# Altium PCB JLink-OB-Wiki.PcbDoc
Units mil, origin at the board's own origin, x right, y up, seen from the top; angles counter-clockwise.
Board outline 1290 x 1300 mil, 2 copper layers (Top Layer, Bottom Layer); 43 components, 33 nets, 168 pads, 83 vias.
Unrouted connection lines stored in the file: 1.
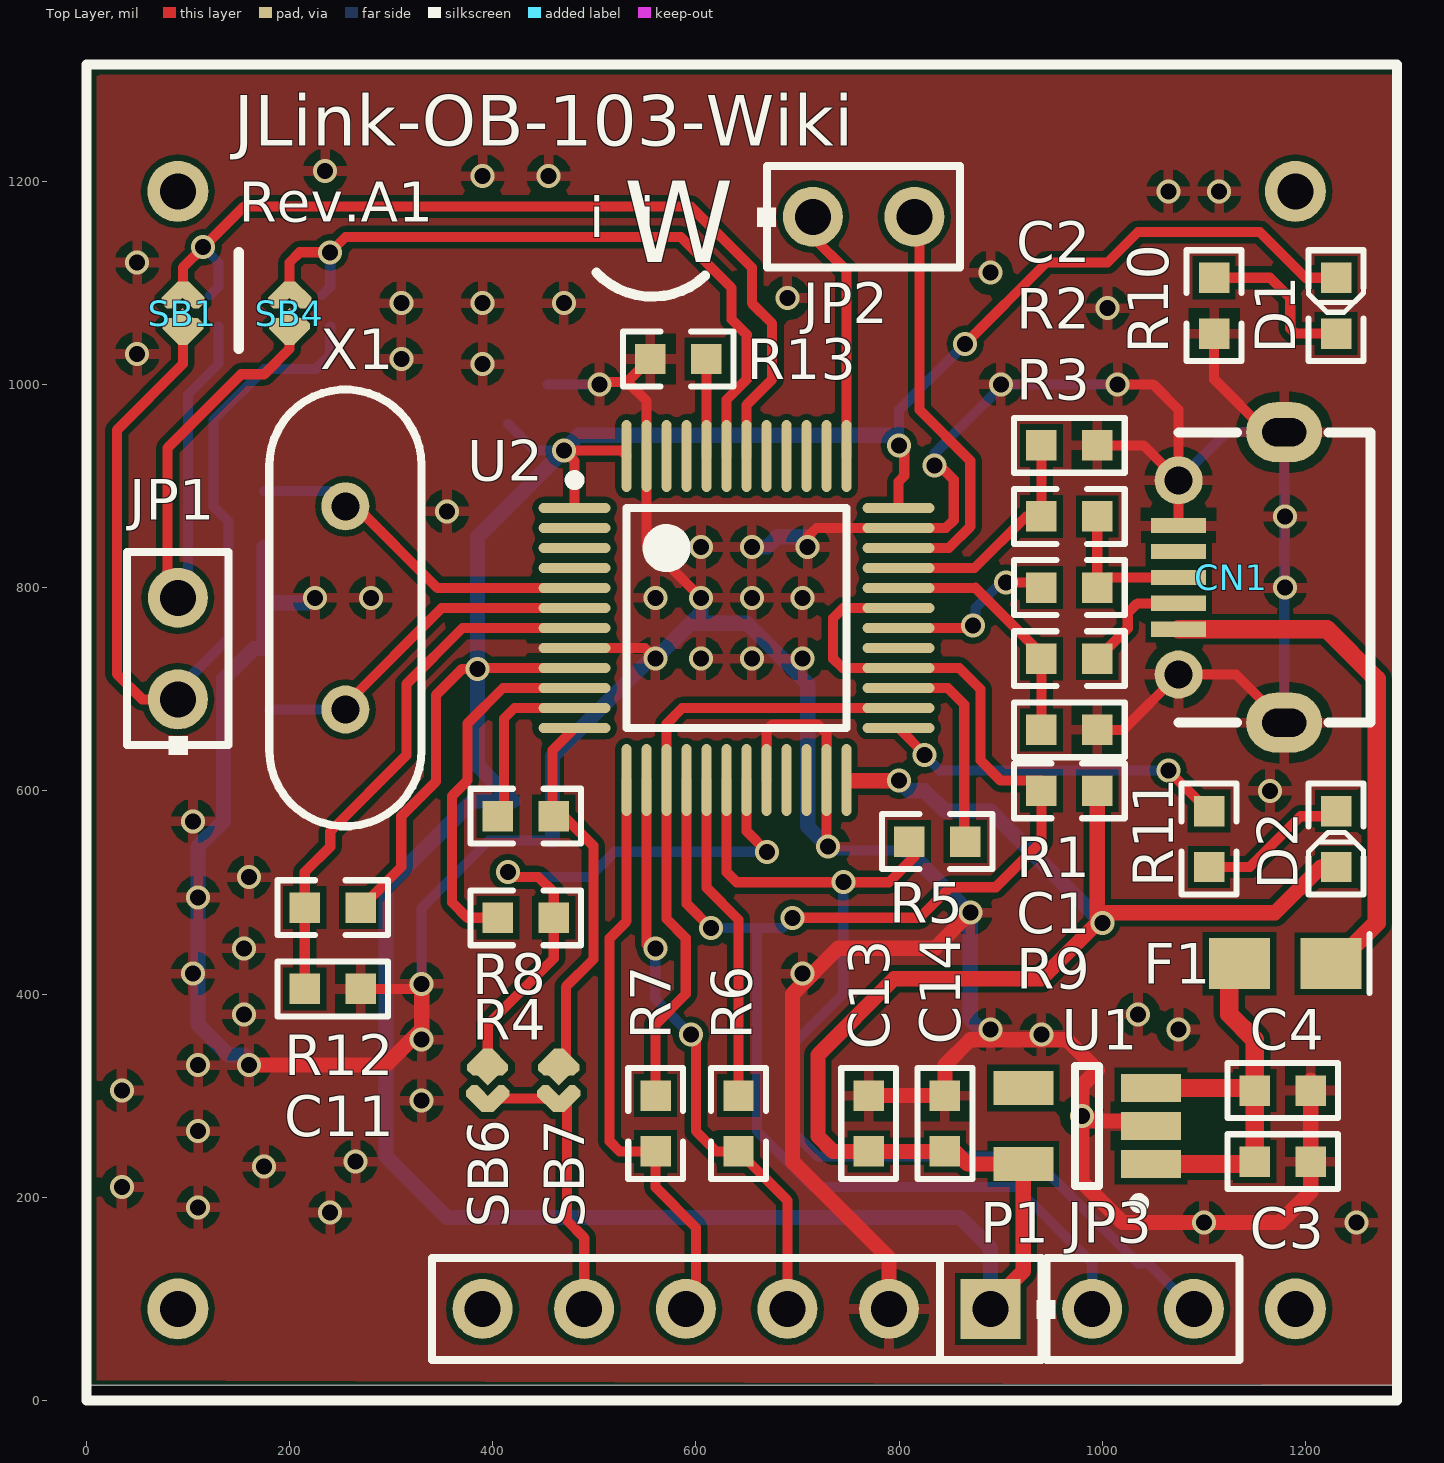
[diagram p0: Top Layer view]
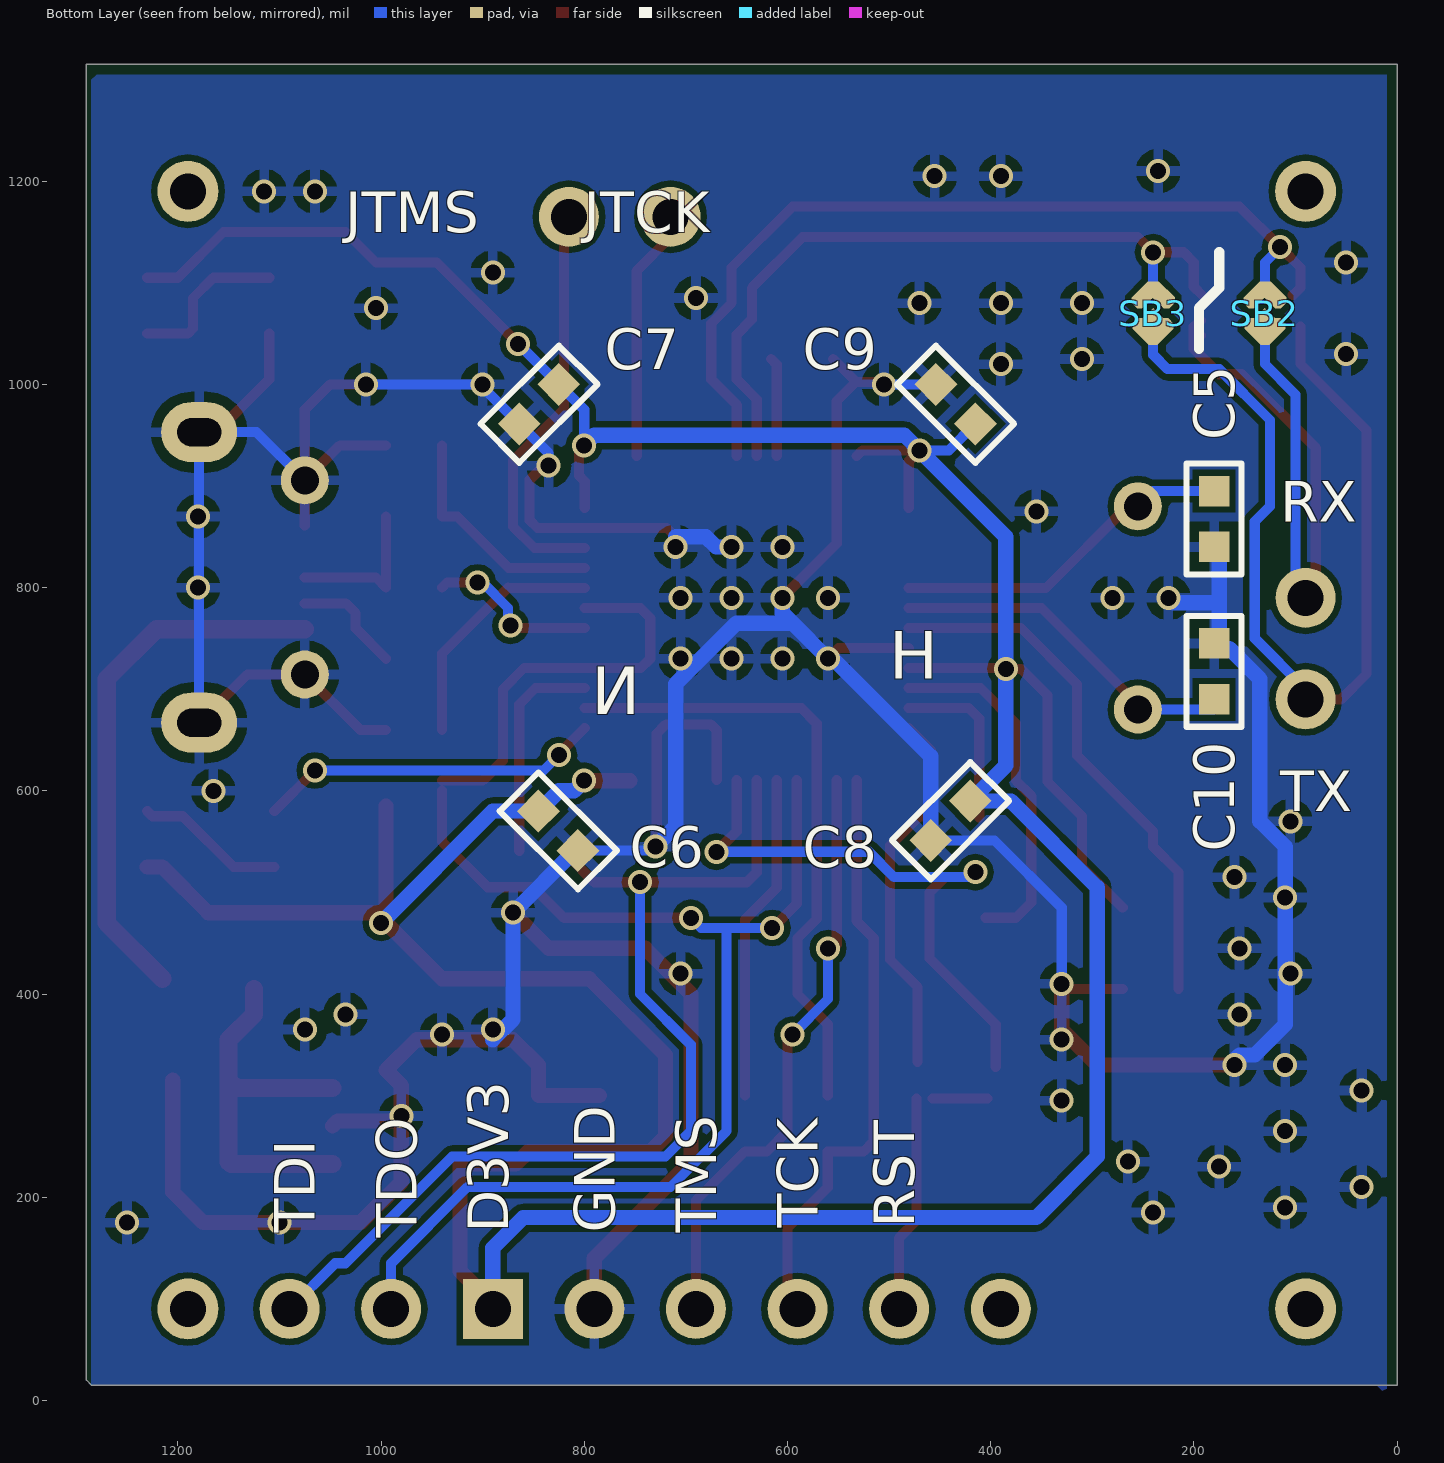
[diagram p1: Bottom Layer view, seen from below]

## Layer stack, top to bottom
Top Solder: solder mask 0.4, Solder Resist, Dk 3.5
Top Layer: signal copper 1.4
Dielectric1: dielectric 12.6, FR-4, Dk 4.8
Bottom Layer: signal copper 1.4
Bottom Solder: solder mask 0.4, Solder Resist, Dk 3.5

## Board outline
0,1315 0,15 1285,15 1290,20 1290,1315

## Design rules (kind name [scope] priority, off if disabled: settings)
Clearance [All] p1: gap=6
PolygonConnect [All] p1: connectstyle=Relief reliefconductorwidth=10 reliefentries=4 polygonreliefangle="90 Angle" airgapwidth=10
RoomDefinition JLink-OB-Wiki [InComponentClass('JLink-OB-Wiki')] p1: confinementstyle=ConfineIn formatcopy=TRUE lockcomponents=FALSE outline 10,10 1290,10 1290,1315 10,1315
RoutingCorners [All] p1: cornerstyle=Round minsetback=100 maxsetback=100
RoutingVias [All] p1: holewidth=15.75 width=23.62 viastyle="Through Hole" minholewidth=15.75 minwidth=23.62 maxholewidth=15.75 maxwidth=23.62
SolderMaskExpansion [All] p1: expansion=4
Width [All] p1: maxlimit=50 minlimit=8 preferedwidth=10
29 further rules are at their usual default settings.

## Components (designator, comment, footprint, x,y, rotation, side; value= is the part's Value field where it differs from the comment)
C1 "Cap_0603" 0603C 995,660 r180 top
C2 "Cap_0603" 0603C 995,940 r180 top
C3 "1uF" 0603C 1205,235 r180 top
C4 "100nF" 0603C 1205,305 r180 top
C5 "Cap_0603" 0603C 180,895 r270 bottom
C6 "Cap_0603" 0603C 845,580 r225 bottom
C7 "Cap_0603" 0603C 825,1000 r315 bottom
C8 "Cap_0603" 0603C 420,590 r315 bottom
C9 "Cap_0603" 0603C 415,961.11 r45 bottom
C10 "Cap_0603" 0603C 180,690 r90 bottom
C11 "Cap_0603" 0603C 215,405 r0 top
C13 "100nF" 0603C 770,300 r270 top
C14 "1uF" 0603C 845,245 r90 top
CN1 "USB-Micro" USB_MICRO_5S_B 1075,810 r270 top locked
D1 "LED_0603" LED-0603 1230,1105 r270 top
D2 "LED_0603" LED-0603 1230,525 r90 top
F1 "500mA" 0805M 1225,430 r180 top
JP1 "JP2" HDR1X2/2.54mm 90,690 r90 top
JP2 "JP2" HDR1X2/2.54mm 715,1165 r0 top
JP3 "JP2" HDR1X2/2.54mm 990,90 r0 top
P1 "Synio Power Header 6 Pin" HDR1X6/2.54MM 890,90 r180 top (schematic designator SW)
R1 "Res_0603" 0603R 995,730 r180 top
R2 "Res_0603" 0603R 995,870 r180 top
R3 "Res_0603" 0603R 995,800 r180 top
R4 "Res_0603" 0603R 460,475 r180 top
R5 "Res_0603" 0603R 810,550 r0 top
R6 "Res_0603" 0603R 641.87,245 r90 top
R7 "Res_0603" 0603R 560.31,245 r90 top
R8 "Res_0603" 0603R 460,575 r180 top
R9 "Res_0603" 0603R 940,600 r0 top
R10 "Res_0603" 0603R 1110,1050 r90 top
R11 "Res_0603" 0603R 1105,580 r270 top
R12 "Res_0603" 0603R 215,485 r0 top
R13 "Res_0603" 0603R 555,1025 r0 top
SB1 "Circuit Breaker" JP2_SMD 95,1070 r270 top
SB2 "Circuit Breaker" JP2_SMD 130,1070 r270 bottom
SB3 "Circuit Breaker" JP2_SMD 240,1070 r270 bottom
SB4 "Circuit Breaker" JP2_SMD 200,1070 r270 top
SB6 "Circuit Breaker" JP2_SMD 395,315 r90 top
SB7 "Circuit Breaker" JP2_SMD 465,315 r90 top
U1 "LDO" SOT23-5 985,270 r180 top
U2 "STM32F103C" LQFP48_N 640,770 r0 top (schematic designator STM32)
X1 "XTAL_5032_2P" XTAL 255,780 r90 top (schematic designator XT)

## Footprints (in the part's own frame and the unit in brackets; to place one, negate y for a bottom-side part, rotate by r counter-clockwise, add the part's x,y. Pads: shape width x height; smd on the part's side, far side on the other; paste and mask are expansions set on the pad)
0603C [mil]
  rect 30x30 smd: 1(0,0) 2(55,0)
  silkscreen extent -27,-27 82,27, body extent -4,-16 59,16, height 12
0603R [mil]
  rect 30x30 smd: 1(0,0) 2(55,0)
  silkscreen extent -27,-27 82,27, body extent -4,-18 58,16, height 18
0805M [mil]
  rect 60x50 smd: 1(0,0) 2(90,0)
  silkscreen extent -38,-29 -38,29
HDR1X2/2.54mm [mm]
  round 1.5 hole 0.9: 1(0,0) 2(2.54,0)
  silkscreen extent -1.4,-1.27 3.68,1.27, body extent -1.29,-1.5 3.79,1.42, height 8.51
HDR1X6/2.54MM [mm] "Connector; Header; 6 Position"
  rect 1.5x1.5 hole 0.9: 1(0,0)
  round 1.5 hole 0.9: 2(2.54,0) 3(5.08,0) 4(7.62,0) 5(10.16,0) 6(12.7,0)
  silkscreen extent -1.52,-1.27 13.97,1.27, body extent -1.32,-1.5 13.92,1.42, height 8.51
JP2_SMD [mil]
  oct 15x30 smd rot 45: 1(-18,-8) 2(18,7)
  oct 15.75x30 smd rot 135: 1(-18,8)
  rect 26x26 smd rot 45: 2(13,0)
  oct 15x30 smd rot 135: 2(18,-7)
LED-0603 [mil]
  rect 30x30 smd: 1(0,0) 2(55,0)
  silkscreen extent -27,-27 82,27, body extent -6,-14 58,17, height 24
LQFP48_N [mm] "Thin QFP, 48-Leads, Body 7x7mm, Pitch 0.5mm, IPC Medium Density"
  oval 1.8x0.25 smd: 1(-4.05,2.75) 2(-4.05,2.25) 3(-4.05,1.75) 4(-4.05,1.25) 5(-4.05,0.75) 6(-4.05,0.25) 7(-4.05,-0.25) 8(-4.05,-0.75) 9(-4.05,-1.25) 10(-4.05,-1.75) 11(-4.05,-2.25) 12(-4.05,-2.75) 25(4.05,-2.75) 26(4.05,-2.25) 27(4.05,-1.75) 28(4.05,-1.25) 29(4.05,-0.75) 30(4.05,-0.25) 31(4.05,0.25) 32(4.05,0.75) 33(4.05,1.25) 34(4.05,1.75) 35(4.05,2.25) 36(4.05,2.75)
  oval 0.25x1.8 smd: 13(-2.75,-4.05) 14(-2.25,-4.05) 15(-1.75,-4.05) 16(-1.25,-4.05) 17(-0.75,-4.05) 18(-0.25,-4.05) 19(0.25,-4.05) 20(0.75,-4.05) 21(1.25,-4.05) 22(1.75,-4.05) 23(2.25,-4.05) 24(2.75,-4.05) 37(2.75,4.05) 38(2.25,4.05) 39(1.75,4.05) 40(1.25,4.05) 41(0.75,4.05) 42(0.25,4.05) 43(-0.25,4.05) 44(-0.75,4.05) 45(-1.25,4.05) 46(-1.75,4.05) 47(-2.25,4.05) 48(-2.75,4.05)
  silkscreen extent -4.17,-2.75 2.75,3.57, body extent -3.5,-3.5 3.5,3.5, height 1.6
SOT23-5 [mm] "Thin QFP, 48-Leads, Body 7x7mm, Pitch 0.5mm, IPC Medium Density"
  rect 1.5x0.7 smd: 1(-1.595,0.95) 2(-1.595,0) 3(-1.595,-0.95)
  rect 1.5x0.85 smd: 4(1.595,-0.95) 5(1.595,0.95)
  silkscreen extent -1.42,-1.5 0.3,2.05, body extent -1.39,-1.46 1.41,1.44, height 1.09
USB_MICRO_5S_B [mil] "USB Micro SMT 5S B"
  oval 59.06x74.8 hole 27.56 slot 43.31 at 90 deg: 0(-143,104) 0(143,104)
  round 47.24 hole 27.5: 0(-95.5,0) 0(95.5,0)
  rect 15x54 smd: 1(51,0) 2(25.5,0) 3(0,0) 4(-25.5,0) 5(-51,0)
  silkscreen extent -143,0 143,189, body extent -161,-9 161,204, height 105
XTAL [mm] "Radial Cap, Thru-Hole; 2 Leads; 0.2 in Pin Spacing"
  round 1.2 hole 0.7: 1(-2.54,0) 2(2.54,0)
  silkscreen extent -5.46,-1.91 5.46,1.91, body extent -5.33,-2.05 5.33,2.05, height 3.22

## Part data
C1 C2 C5 C6 C7 C8 C9 C10 C11: "Capacitor"
C3 C14: library part "CAP SMD 0603  X5R 1µF 25V 10%", "0603  X5R 1µF"
C4 C13: library part Capacitor_ST, "Capacitor 0402 / 0603 / 0805"
D1 D2: "LED"
F1: library part Res, "Resistor"
R1 R2 R3 R4 R5 R6 R7 R8 R9 R10 R11 R12 R13: "Resistor"
U1: library part LDO-SOT23-5, "General LDO SOT23-5"
U2: "MCU"
X1: "Crystal Oscillator"

## Free pads (board coordinates)
  round 60 hole 35.43: 0(90,1190) 1(1190,1190) 2(1190,90) 3(90,90)

## Via types
v1: diameter 23.62, hole 15.75, Top Layer to Bottom Layer, 83 vias

## Nets (pads, with @x,y where several pads share a name; then routed paths per layer and width w, separated by ;. In a path a pad name is that pad's centre, name@x,y a point inside that pad or via, vN(x,y) a via of type N, cw(c..) or ccw(c..) an arc to the next point about the centre after c; other vN are vias at no path point)
D3V3: C6.1 C7.1 C8.1 C9.1 C13.2 C14.1 D1.1 D2.1 P1.1 R9.2 R12.2 U1.5 U2.1 U2.9 U2.24 U2.36 U2.48 | length 4499.2
  Top Layer w10: R12.2 310,525 310,575 344,609 344,694 370,720 v1(385,720) 385.79,720.79 U2.9 ; U2.1 480.55,924.45 v1(470,935) 526.18,935 U2.48 ; U2.36 799.45,904.45 805,910 805,935 v1(800,940) ; v1(865,1040) 945,1120 1005,1120 1035,1150 1155,1150 1200,1105 D1.1
  Top Layer w15: 755,610 v1(800,610) ; P1.1@890,95 922.2,127.2 U1.5 867.4,232.6 855,245 C14.1 735,245 720,260 720,340 795,415 940,415 1005,480 1170,480 1215,525 D2.1 ; R9.2@995,585 995,475 v1(1000,470)
  Bottom Layer w10: C9.1 441.11,935 v1(470,935) ; v1(800,940) 800,975 C7.1 v1(865,1040)
  Bottom Layer w15: v1(800,610) 810,600 825,600 C6.1 890,580 v1(1000,470) ; v1(800,940) 790,950 485,950 v1(470,935) 385,850 v1(385,720) 385,625 C8.1 380,590 295,505 295,240 355,180 860,180 890,150 P1.1@890,95
DM: C1.2 R1.2 U2.32 | length 242.7
  Top Layer w10: U2.32 874.53,799.53 875,800 940,735 R1.2 C1.2
DP: C2.2 R2.2 U2.33 | length 231.6
  Top Layer w10: U2.33 874.21,819.21 925,870 R2.2 C2.2
GND: C1.1 C2.1 C3.1 C4.1 C5.2 C6.2 C7.2 C8.2 C9.2 C10.2 C11.2 C13.1 C14.2 CN1.0 CN1.5 P1.2 R10.1 R13.1 U1.2 U2.8 U2.20 U2.23 U2.35 U2.47 | length 5633.6
  Top Layer w10: C11.2 325,405 v1(330,410) ; U2.8 549.53,740.47 v1(560,730) ; v1(505,1000) 507.5,1002.5 532.5,1002.5 ; R13.1 532.5,1002.5 ; v1(605,790) 551.42,843.58 U2.47 551.42,983.58 532.5,1002.5 ; U2.20 669.53,659.53 675.42,665.42 719.58,665.42 728.58,656.42 U2.23 728.58,546.42 v1(730,545) ; v1@710,850 718.58,858.58 U2.35 845.95,858.58 853.69,866.31 853.69,906.31 835,925 v1(835,920) ; C1.1 1020.5,660 1075,714.5 1131.5,714.5 CN1.0@1179,667 ; C2.1 1040.5,940 CN1.0@1075,905.5 ; v1(1015,1000) 1050,1000 1075,975 CN1.0@1075,905.5 ; CN1.5 CN1.0@1075,905.5 ; R10.1 1110,1005 1162,953 CN1.0@1179,953
  Top Layer w15: v1(160,330) 295,330 330,365 v1(330,410) ; 785,300 C14.2 845,330 870,355 965,355 995,325 980,310 v1@980,275 ; P1.2@790,95 790,140 695,235 695,400 740,445 835,445 v1(870,480) ; U1.2 1042.8,275 v1@980,275 ; C4.1@1205,315 C3.1 1205,205 1175,175 1020,175 980,215 v1@980,275
  Bottom Layer w10: v1(330,410) 330,485 396.11,551.11 C8.2 ; C9.2 v1(505,1000) ; v1(730,545) 733.89,541.11 C6.2 ; v1(835,920) 835,932.22 C7.2 902.78,1000 v1(1015,1000) ; CN1.0@1075,905.5 1122.5,953 1179,953 CN1.0@1179,667
  Bottom Layer w15: v1(160,330) 160,335 155,340 140,340 110,370 110,545 135,570 135,710 165,740 175,740 175,785 ; C5.2@175,840 175,785 ; v1(225,790) 220,785 175,785 ; C8.2 458.89,633.89 555,730 v1(560,730) 595,765 ; v1(605,790) 605,775 595,765 ; v1@660,840 670,840 680,850 v1@710,850 ; v1(730,545) 710,565 710,705 650,765 595,765 ; C6.2 808.89,541.11 v1(870,480) 870,375 v1@890,355
  other v1: 1100,175 1250,175 240,185 110,190 35,210 175,230 265,235 110,265 980,280 330,295 35,305 110,330 330,355 940,360 890,365 1075,365 155,380 1035,380 105,420 705,420 155,445 110,495 160,515 105,570 1165,600 605,730 655,730 705,730 280,790 560,790 655,790 705,790 1180,800 605,840 655,840 710,840 1180,870 355,875 900,1000 390,1020 310,1025 50,1030 1005,1075 310,1080 390,1080 470,1080 690,1085 890,1110 50,1120 1065,1190 1115,1190 390,1205 455,1205 235,1210
JTCK: JP2.1 U2.37 | length 254.3
  Top Layer w10: JP2.1@715,1170 715,1145 748.27,1111.73 U2.37
JTMS: JP2.2 U2.34 | length 412.1
  Top Layer w10: U2.34 848.9,838.9 870,860 870,925 820,975 820,1140 815,1145 JP2.2@815,1170
LED: R11.1 U2.25 | length 340.1
  Top Layer w10: U2.25 825,636.18 v1(825,635) ; v1(1065,620) R11.1
  Bottom Layer w10: v1(825,635) 840,620 v1(1065,620)
NetC5_1: C5.1 U2.5 X1.2 | length 345.1
  Top Layer w10: X1.2 265,880 345.47,799.53 U2.5
  Bottom Layer w10: C5.1@175,895 240,895 X1.2
NetC10_1: C10.1 U2.6 X1.1 | length 344.8
  Top Layer w10: X1.1 255,685 349.84,779.84 U2.6
  Bottom Layer w10: C10.1@180,680 X1.1
NetC11_1: C11.1 R12.1 U2.7 | length 529.8
  Top Layer w10: C11.1 R12.1 215,520 240,545 240,560 315,635 315,705 370.16,760.16 U2.7
NetCN1_1: CN1.1 F1.1 | length 533.1
  Top Layer w18: CN1.1 1221,759 1270,710 1270,470 F1.1@1215,415
NetCN1_2: CN1.2 R1.1 | length 111.4
  Top Layer w10: R1.1 1025,760 1025,775 1034.5,784.5 CN1.2
NetCN1_3: CN1.3 R2.1 R3.1 | length 154.1
  Top Layer w10: R2.1 R3.1 1005,810 CN1.3
NetD1_2: D1.2 R10.2 | length 160.4
  Top Layer w10: R10.2 1165,1105 1185,1085 1185,1055 1190,1050 D1.2
NetD2_2: D2.2 R11.2 | length 147.8
  Top Layer w10: R11.2 1145,525 1195,575 1225,575 D2.2
NetR13_2: R13.2 U2.44 | length 97.8
  Top Layer w10: U2.44 610.47,1019.47 R13.2@616,1025
NetSB1_1: SB1.1 SB2.1 U2.42 | length 901.4
  Top Layer w10: SB1.1@103,1088 102,1088 95,1095 95,1115 v1(115,1135) 155,1175 595,1175 655,1115 655,1080 675,1060 675,1005 649.84,979.84 U2.42
  Bottom Layer w10: v1(115,1135) 130,1120 130,1096 SB2.1@122,1088
NetSB3_1: SB3.1 SB4.1 U2.43 | length 726.7
  Top Layer w10: SB4.1@192,1088 200,1096 200,1120 210,1130 v1(240,1130) 255,1145 585,1145 635,1095 635,1064 650,1049 650,1005 630.16,985.16 U2.43
  Bottom Layer w10: SB3.1@232,1088 240,1096 v1(240,1130)
NRST: P1.5 SB6.1 SB7.1 | length 268
  Top Layer w10: SB6.1@403,297 SB7.1@457,297 ; SB7.1@473,297 473,177 490,160 P1.5
RXD: JP1.2 SB2.2 SB4.2 | length 637.4
  Top Layer w10: JP1.2 90,800 80,810 80,937.5 152.5,1010 175,1010 200,1035 SB4.2@200,1057 ; SB4.2@193,1048 SB4.2@200,1055 ; SB4.2@193,1063 SB4.2@200,1056
  Bottom Layer w10: JP1.2 100,800 100,990 130,1020 SB2.2@130,1057
TCK_I: P1.4 R7.1 R8.2 U2.11 U2.13 | length 753.4
  Top Layer w10: R8.2@411.11,573.89 411.11,671.11 421.42,681.42 U2.11 ; U2.13 531.73,471.73 515,455 515,255 525,245 R7.1 560.31,209.69 600,170 600,105 P1.4@590,95
TCK_O: R7.2 U2.15 U2.26 | length 620.9
  Top Layer w10: R7.2 560.31,370.31 590,400 590,455 571.1,473.9 U2.15 571.1,666.1 586.42,681.42 U2.26
TDI_I: JP3.2 R5.1 U2.18 | length 1023.2
  Top Layer w10: U2.18 630.16,519.84 640,510 v1(745,510) 790,510 R5.1@815,535
  Bottom Layer w10: v1(745,510) 745,400 695,350 695,265 720,240 930,240 1035,135 1045,135 JP3.2
TDI_O: R5.2 U2.27 | length 215.2
  Top Layer w10: U2.27 847.9,701.1 864,685 R5.2@864,541
TDO_I: JP3.1 R9.1 U2.16 U2.28 U2.31 | length 1599.2
  Top Layer w10: U2.16 590.79,488.68 614.47,465 v1(615,465) ; v1(695,475) 820,475 850,505 895,505 940,550 R9.1 ; U2.31 744.84,779.84 735,770 735,730 744.21,720.79 U2.28 859.21,720.79 880,700 880,630 900,610 R9.1@940,610
  Bottom Layer w10: v1(615,465) 660,465 ; v1(695,475) 685,465 660,465 ; JP3.1 990,135 915,210 715,210 660,265 660,465
TMS_I: P1.3 R6.1 U2.14 | length 588.7
  Top Layer w10: U2.14 551.42,448.58 555,445 v1(560,445) ; v1(595,360) 600,355 600,265 620,245 R6.1 690,196.88 P1.3@690,95
  Bottom Layer w10: v1(560,445) 560,395 v1(595,360)
TMS_O: R6.2 U2.17 | length 323.6
  Top Layer w10: U2.17 610.47,504.53 641.88,473.12 R6.2
TRES_I: R8.1 SB7.2 U2.12 | length 371.4
  Top Layer w10: SB7.2@472,333 472,407 499,434 499,546 470,575 R8.1 458.82,576.18 458.82,640 U2.12
TRST_I: R4.1 SB6.2 U2.19 | length 601.5
  Top Layer w10: SB6.2@395,328 395,370 460,435 R4.1 460,500 445,515 420,515 v1(415,520) ; U2.19 649.84,560.16 v1(670,540)
  Bottom Layer w10: v1(415,520) 415,515 495,515 520,540 v1(670,540)
TRST_O: R4.2 U2.10 | length 353.6
  Top Layer w10: R4.2 375,475 360,490 360,595 375,610 375,666.1 410,701.1 U2.10
TXD: JP1.1 SB1.2 SB3.2 | length 914.8
  Top Layer w10: JP1.1@90,700 80,690 55,690 30,715 30,955 95,1020 SB1.2@95,1057
  Bottom Layer w10: JP1.1 90,700 140,750 140,865 125,880 125,965 175,1015 225.86,1015 240,1029.14 SB3.2@240,1057
U5V: C3.2 C4.2 F1.2 U1.1 U1.3 | length 388.9
  Top Layer w18: U1.1 1147.6,232.6 C3.2 C4.2@1150,315 ; U1.3 1142.4,307.4 C4.2@1150,315 ; F1.2@1125,405 1125,380 1150,355 C4.2@1150,315
USB_PU: R3.2 U2.30 | length 170
  Top Layer w10: U2.30 870.16,760.16 v1(872.58,762.58) ; v1(905,805) 935,805 R3.2
  Bottom Layer w10: v1(872.58,762.58) 875,765 875,780 900,805 v1(905,805)
pads on no net: CN1.4 P1.6 U1.4 U2.2 U2.3 U2.4 U2.21 U2.22 U2.29 U2.38 U2.39 U2.40 U2.41 U2.45 U2.46

## Polygon pours and split planes (outlines as drawn)
GND on Top Layer "TL-GND" (solid, remove dead copper, pour order 14): 10,20 10,1310 15,1305 1290,1305 1290,20 1285,15
GND on Bottom Layer "BL-GND" (solid, remove dead copper, pour order 12): 10,1305 1280,1305 1285,1300 1285,15 20,15 10,5

## Silkscreen, mask and mechanical layers (free items; w line width, h text height)
Top Overlay:
  lines w10: 150,1035 150,1130 ; 502,1110 ccw(c557,1162) 609,1107 ; 0,0 1290,0 1290,1315 0,1315 0,0
  text "JLink-OB-103-Wiki" at 145,1235 h50
  text "Rev.A1" at 150,1160 h39.37
  text "i  i" at 495,1145 h40
  text "W" at 529,1120 h80
Bottom Overlay:
  lines w10: 175,1130 175,1095 195,1075 195,1035
  text "JTMS      JTCK" at 1035,1150 h40
  text "RX" at 115,865 h40
  text "H" at 500,695 h80
  text "N" at 745,660 h80
  text "TX" at 115,580 h40
  text "RST" at 475,170 h40 r270
  text "TCK" at 570,170 h40 r270
  text "TMS" at 670,165 h40 r270
  text "GND" at 770,165 h40 r270
  text "D3V3" at 875,165 h40 r270
  text "TDI" at 1065,165 h40 r270
  text "TDO" at 965,160 h40 r270